# EAGLE board led1 (EAGLE 6.2)
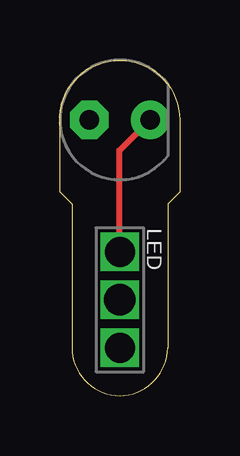
[diagram p0: board, top side]
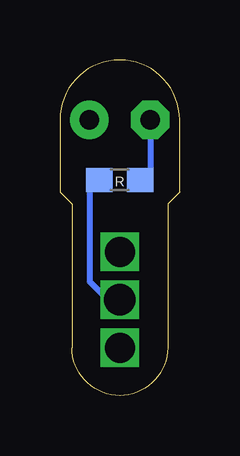
[diagram p1: board, bottom side, seen from below]

Size 5 x 14 mm. Coordinates in mm from the lower left corner, seen from the top.
Outline: 2.5,0 arc90 4.5,2 4.5,8 5,8.5 5,11.5 arc90 2.5,14 arc90 0,11.5 0,8.5 0.5,8 0.5,2 arc90 2.5,0
Copper layers (1*16): Top 0.035mm / dielectric 1.5mm / Bottom 0.035mm
Design rules: minimum track width 10mil, minimum drill 24mil, track to track 8mil, track to pad 8mil, pad to pad 8mil, via to via 8mil, smd to smd 8mil, copper to edge 40mil, drill to drill 8mil, minimum pad ring 5mil, minimum via ring 8mil, stop-mask expansion 4mil, vias tented up to drill 0mil, thermal gap 10mil

## Footprints (pad centres in the part's own frame; a part is rotated, then mirrored left to right if it is on the bottom)
SENSOR_HEADER = drill 1.25 pad 1.6 square: 1 0,2; 3 0,-2 | drill 1.3 pad 1.6 square: 2 0,0
LED = drill 0.8 pad 1.6 octagon: P$1 -1.27,0 | drill 0.8 pad 1.6: P$2 1.27,0
0603 = smd 1.1 x 1: 1 -0.85,0; 2 0.85,0

## Placement (x,y rotation side)
E$2  [SENSOR_HEADER]  2.5,4 0 top
E$5  [LED]  2.5,11.5 0 top
R  [0603]  2.5,9 180 bottom

## Library data of the parts
E$2 E$5 = appessory
R = SparkFun

## Nets
S$2: E$2.2

## Tracks (layer width: path | path; a pad name or v marks a point on that pad's centre or on a via)
S$1
  Bottom 0.254: 1.21,11.49 1.21,9.4 1.66,8.95
S$2
  Bottom 0.254: E$2.2 3,4 3.75,4.75 3.75,8.75
S$3
  Top 0.254: 2.48,5.97 2.48,10.22 3.82,11.56

## Text on the board
tPlace: LED